# Altium PCB plexus_sense_template.PcbDoc
Units mil, origin at the board's own origin, x right, y up, seen from the top; angles counter-clockwise.
Board outline 765.97 x 2833.9 mil, 4 copper layers (Top Layer, Int1 (GND), Int2 (PWR), Bottom Layer), stack 16.657 mil thick; 1 components, 18 nets, 34 pads, 17 vias.
Unrouted connection lines stored in the file: 51.
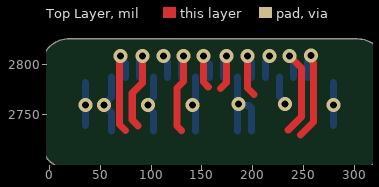
[diagram p0: Top Layer view]
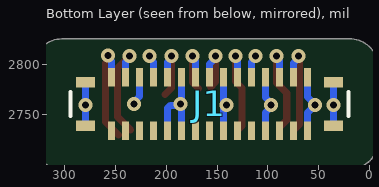
[diagram p1: Bottom Layer view, seen from below]

## Layer stack, top to bottom
Top Solder: solder mask 0.2362, SM-001, Dk 4
Top Layer: signal copper 0.9843
Dielectric 1: prepreg 5.1, PP-017, Dk 4.3
Dielectric 2: prepreg 0.5118, PP-017, Dk 4.3
Int1 (GND): signal copper 0.4724
Dielectric 3: core 2.5197, Core-039, Dk 4.8
Int2 (PWR): signal copper 0.4724
Dielectric 4: prepreg 0.5118, PP-017, Dk 4.3
Dielectric 5: prepreg 5.1, PP-017, Dk 4.3
Bottom Layer: signal copper 0.9843
Bottom Solder: solder mask 0.2362, SM-001, Dk 4

## Board outline
-8.97,80.79 -8.97,160.32 -8.97,160.41 -8.95,804.57 cw(c61.57,804.57) 14.79,857.35 29.55,872.1 56.01,898.57 56.01,2356.34 56.01,2688.03 ccw(c47.24,2688.03) 47.43,2696.79 33.46,2696.8 19.69,2696.8 47.24,2696.8 19.68,2696.8 cw(c19.68,2725.43) -8.95,2725.4 -8.95,2725.43 -8.95,2796.3 cw(c19.68,2796.3) 19.68,2824.94 167.7,2824.94 302.79,2824.89 cw(c302.78,2796.26) 331.42,2796.26 331.42,2725.39 331.42,2725.35 cw(c302.79,2725.39) 302.79,2696.75 289.01,2696.75 275.23,2696.75 ccw(c275.23,2687.99) 266.46,2687.99 266.46,2356.3 266.46,902.33 293.68,875.11 669.29,875.11 669.53,875.1 cw(c669.3,787.41) 757,787.51 757,787.4 757,78.74 756.99,78.5 cw(c669.29,78.73) 669.34,-8.97 80.79,-8.97 cw(c80.79,80.79)

## Design rules (kind name [scope] priority, off if disabled: settings)
BoardOutlineClearance [All] p1: gap=8 ignorepadtopadclearanceinfootprint=FALSE
Clearance [All] p1: gap=5 ignorepadtopadclearanceinfootprint=FALSE
DiffPairsRouting [All] p1: maxlimit=10 minlimit=10 mostfreqgap=10 substack1={99EB5755-EF74-4D5A-A978-238EC0D97C25} toplayer_{99eb5755-ef74-4d5a-a978-238ec0d97c25}_minwidth=15 toplayer_{99eb5755-ef74-4d5a-a978-238ec0d97c25}_maxwidth=15 toplayer_{99eb5755-ef74-4d5a-a978-238ec0d97c25}_prefwidth=15 midlayer1_{99eb5755-ef74-4d5a-a978-238ec0d97c25}_minwidth=15 midlayer1_{99eb5755-ef74-4d5a-a978-238ec0d97c25}_maxwidth=15 midlayer1_{99eb5755-ef74-4d5a-a978-238ec0d97c25}_prefwidth=15 midlayer2_{99eb5755-ef74-4d5a-a978-238ec0d97c25}_minwidth=15 midlayer2_{99eb5755-ef74-4d5a-a978-238ec0d97c25}_maxwidth=15 midlayer2_{99eb5755-ef74-4d5a-a978-238ec0d97c25}_prefwidth=15 bottomlayer_{99eb5755-ef74-4d5a-a978-238ec0d97c25}_minwidth=15 bottomlayer_{99eb5755-ef74-4d5a-a978-238ec0d97c25}_maxwidth=15 bottomlayer_{99eb5755-ef74-4d5a-a978-238ec0d97c25}_prefwidth=15 toplayer_minwidth=15 toplayer_maxwidth=15 toplayer_prefwidth=15 midlayer1_minwidth=15 midlayer1_maxwidth=15 midlayer1_prefwidth=15 midlayer2_minwidth=15 midlayer2_maxwidth=15 midlayer2_prefwidth=15 bottomlayer_minwidth=15 bottomlayer_maxwidth=15 bottomlayer_prefwidth=15 substack2={05907A41-C8C6-4068-A653-4EB994F4AA0D} toplayer_{05907a41-c8c6-4068-a653-4eb994f4aa0d}_minwidth=15 toplayer_{05907a41-c8c6-4068-a653-4eb994f4aa0d}_maxwidth=15 toplayer_{05907a41-c8c6-4068-a653-4eb994f4aa0d}_prefwidth=15 midlayer1_{05907a41-c8c6-4068-a653-4eb994f4aa0d}_minwidth=15 midlayer1_{05907a41-c8c6-4068-a653-4eb994f4aa0d}_maxwidth=15 midlayer1_{05907a41-c8c6-4068-a653-4eb994f4aa0d}_prefwidth=15 midlayer2_{05907a41-c8c6-4068-a653-4eb994f4aa0d}_minwidth=15 midlayer2_{05907a41-c8c6-4068-a653-4eb994f4aa0d}_maxwidth=15 midlayer2_{05907a41-c8c6-4068-a653-4eb994f4aa0d}_prefwidth=15 bottomlayer_{05907a41-c8c6-4068-a653-4eb994f4aa0d}_minwidth=15 bottomlayer_{05907a41-c8c6-4068-a653-4eb994f4aa0d}_maxwidth=15 bottomlayer_{05907a41-c8c6-4068-a653-4eb994f4aa0d}_prefwidth=15 maxuncoupledlength=500
PlaneClearance [All] p1: clearance=7
PlaneConnect [All] p1: planeconnectstyle=Direct reliefexpansion=20 reliefentries=4 reliefconductorwidth=10 reliefairgap=10
PolygonConnect [All] p1: thpad.connectstyle=Direct thpad.reliefconductorwidth=10 thpad.reliefentries=4 thpad.polygonreliefangle="90 Angle" thpad.airgapwidth=10 smdpad.connectstyle=Relief smdpad.reliefconductorwidth=7 smdpad.reliefentries=4 smdpad.polygonreliefangle="90 Angle" smdpad.airgapwidth=7 via.connectstyle=Direct via.reliefconductorwidth=10 via.reliefentries=4 via.polygonreliefangle="90 Angle" via.airgapwidth=10
PolygonConnect PolygonConnect_1 [InNet('1V8') vs IsNamedPolygon('1V8_CONN')] p2: connectstyle=Direct reliefconductorwidth=10 reliefentries=4 polygonreliefangle="90 Angle" airgapwidth=10
RoutingVias [All] p1: holewidth=10 width=50 viastyle="Through Hole" minholewidth=10 minwidth=20 maxholewidth=28 maxwidth=50
SolderMaskExpansion [IsVia] p1: expansion=4 istentingtop=TRUE
Width [All] p1: maxlimit=25 minlimit=4 preferedwidth=7 substack1={99EB5755-EF74-4D5A-A978-238EC0D97C25} substack2={05907A41-C8C6-4068-A653-4EB994F4AA0D}
27 further rules are at their usual default settings.

## Components (designator, comment, footprint, x,y, rotation, side; value= is the part's Value field where it differs from the comment)
J1 "BM23FR0.6-30DP-0.35V_895_" BM23FR0630DP035V895 157.48,2760.83 r180 bottom

## Footprints (in the part's own frame and the unit in brackets; to place one, negate y for a bottom-side part, rotate by r counter-clockwise, add the part's x,y. Pads: shape width x height; smd on the part's side, far side on the other; paste and mask are expansions set on the pad)
BM23FR0630DP035V895 [mm]
  rect 0.18x0.46 smd mask+0.08: 1(-2.45,-0.67) 2(-2.45,0.67) 3(-2.1,-0.67) 4(-2.1,0.67) 5(-1.75,-0.67) 6(-1.75,0.67) 7(-1.4,-0.67) 8(-1.4,0.67) 9(-1.05,-0.67) 10(-1.05,0.67) 11(-0.7,-0.67) 12(-0.7,0.67) 13(-0.35,-0.67) 14(-0.35,0.67) 15(0,-0.67) 16(0,0.67) 17(0.35,-0.67) 18(0.35,0.67) 19(0.7,-0.67) 20(0.7,0.67) 21(1.05,-0.67) 22(1.05,0.67) 23(1.4,-0.67) 24(1.4,0.67) 25(1.75,-0.67) 26(1.75,0.67) 27(2.1,-0.67) 28(2.1,0.67) 29(2.45,-0.67) 30(2.45,0.67)
  rect 0.47x0.26 smd: MP1(-3.1,-0.54) MP2(-3.1,0.54) MP3(3.1,-0.54) MP4(3.1,0.54)
  silkscreen extent -3.47,-0.3 3.47,0.3, body extent -3.47,-0.88 3.47,0.88, height 0.71

## Part data
J1: "Connector", Manufacturer_Name=Hirose, Manufacturer_Part_Number=BM23FR0.6-30DP-0.35V(895), Mouser Part Number=798-3FR0630DP035V895, Datasheet Link=https://www.hirose.com/product/document?clcode=CL0480-0325-0-95&productname=BM23FR0.6-30DP-0.35V(895)&series=BM23FR&documenttype=2DDrawing&lang=en&documentid=D164575_en, Height=0.615mm, Mouser Price/Stock=https://www.mouser.co.uk/ProductDetail/Hirose-Connector/BM23FR0.6-30DP-0.35V895?qs=YCa%2FAAYMW00qhFyDlbncMA%3D%3D

## Via types
v1: diameter 13.78, hole 6.89, Top Layer to Bottom Layer, tented both sides, 17 vias

## Nets (pads, with @x,y where several pads share a name; then routed paths per layer and width w, separated by ;. In a path a pad name is that pad's centre, name@x,y a point inside that pad or via, vN(x,y) a via of type N, cw(c..) or ccw(c..) an arc to the next point about the centre after c; other vN are vias at no path point)
1V8: J1.1 J1.3 J1.5 J1.7
GND: J1.6 J1.9 J1.11 J1.12 J1.17 J1.18 J1.23 J1.24 J1.29 J1.30 J1.MP1 J1.MP2 J1.MP3 J1.MP4 | length 375.5
  Bottom Layer w7: J1.MP3 v1(35.43,2759.84) J1.MP4 ; J1.29 61.02,2752.23 v1(53.41,2759.84) 53.41,2760.04 61.02,2767.65 J1.30 ; J1.23 102.36,2752.61 96.81,2758.16 v1(96.81,2759.84) 96.81,2761.68 102.36,2767.22 J1.24 ; J1.17 143.7,2755.2 140.9,2758.01 v1(140.9,2759.84) 140.9,2761.68 143.7,2764.48 J1.18 ; J1.11 J1.11 185.08,2759.89 v1(186.02,2760.83) ; J1.12 J1.12 185.08,2761.77 v1(186.02,2760.83) ; J1.9 198.82,2756.73 196.02,2759.53 187.32,2759.53 v1(186.02,2760.83) ; J1.6 226.38,2768.06 231.93,2762.51 v1(231.93,2760.83) ; J1.MP1 v1(279.53,2759.84) J1.MP2
I2C_CH1_SCK: J1.22 | length 22.5
  Bottom Layer w7: v1(112.2,2808.07) 112.2,2806.24 116.1,2802.34 116.1,2787.25 J1.22
I2C_CH1_SDA: J1.20 | length 99.6
  Top Layer w7: 129.92,2734.65 125.51,2739.06 125.51,2776.66 131.89,2783.04 v1(131.89,2808.07)
  Bottom Layer w7: J1.20 129.96,2787.25 129.96,2804.31 131.89,2806.24 v1(131.89,2808.07)
I2C_CH2_SCK: J1.10 | length 63.2
  Top Layer w7: v1(194.88,2808.04) 194.88,2776.58 201.41,2770.05
  Bottom Layer w7: v1(194.88,2808.04) 194.88,2806.2 198.78,2802.31 198.78,2787.25 J1.10
I2C_CH2_SDA: J1.8 | length 22.5
  Bottom Layer w7: J1.8 212.64,2787.25 212.64,2802.3 216.54,2806.2 v1(216.54,2808.03)
I2C_CH3_SCK: J1.28 | length 99.2
  Top Layer w7: v1(69.87,2808.05) 68.8,2806.98 68.8,2740.65 74.8,2734.65
  Bottom Layer w7: v1(69.87,2808.05) 69.87,2806.22 74.76,2801.34 74.76,2787.25 J1.28
I2C_CH3_SDA: J1.26 | length 97.2
  Top Layer w7: 86.97,2739.45 81.43,2744.99 81.43,2771.57 91.54,2781.68 v1(91.54,2808.05)
  Bottom Layer w7: J1.26 88.63,2787.25 88.63,2803.3 91.54,2806.21 v1(91.54,2808.05)
I2C_CH4_SCK: J1.16 | length 55.6
  Top Layer w7: v1(151.57,2808.05) 151.57,2782.43 156.29,2777.71
  Bottom Layer w7: v1(151.57,2808.05) 151.57,2806.21 157.44,2800.35 157.44,2787.25 J1.16
I2C_CH4_SDA: J1.14 | length 56.4
  Top Layer w7: 168.29,2776.2 174.21,2782.12 v1(174.21,2808.05)
  Bottom Layer w7: J1.14 171.3,2787.25 171.3,2803.3 174.21,2806.21 v1(174.21,2808.05)
I2C_CH5_SCK: J1.15
I2C_CH5_SDA: J1.13
I2C_CH6_SCK: J1.4 | length 105.4
  Top Layer w7: 235.05,2735.29 247.96,2748.19 247.96,2796.29 v1(236.22,2808.03)
  Bottom Layer w7: v1(236.22,2808.03) 236.22,2806.19 240.11,2802.3 240.11,2787.25 J1.4
I2C_CH6_SDA: J1.2 | length 107.5
  Top Layer w7: 247.05,2730.31 259.96,2743.22 259.96,2801.26 258.74,2802.48 258.74,2807.27 v1(257.44,2808.57)
  Bottom Layer w7: J1.2 253.98,2787.25 253.98,2803.28 257.44,2806.74 v1(257.44,2808.57)
I2C_CH7_SCK: J1.27
I2C_CH7_SDA: J1.25
I2C_CH8_SCK: J1.21
I2C_CH8_SDA: J1.19 | length 0

## Silkscreen, mask and mechanical layers (free items; w line width, h text height)
Mechanical 1:
  lines w8: 19.68,2696.8 cw(c19.68,2725.43) -8.95,2725.4 -8.95,2725.43 -8.95,2796.3 cw(c19.68,2796.3) 19.68,2824.94 167.7,2824.94 302.79,2824.89 cw(c302.78,2796.26) 331.42,2796.26 331.42,2725.39 331.42,2725.35 cw(c302.79,2725.39) 302.79,2696.75 289.01,2696.75 275.23,2696.75 ccw(c275.23,2687.99) 266.46,2687.99 266.46,2356.3 266.46,902.33 293.68,875.11 669.29,875.11 669.53,875.1 cw(c669.3,787.41) 757,787.51 757,787.4 757,78.74 756.99,78.5 cw(c669.29,78.73) 669.34,-8.97 80.79,-8.97 cw(c80.79,80.79) -8.97,80.79 -8.97,160.32 -8.97,160.41 -8.95,804.57 cw(c61.57,804.57) 14.79,857.35 29.55,872.1 56.01,898.57 56.01,2356.34 56.01,2688.03 ccw(c47.24,2688.03) 47.43,2696.79 33.46,2696.8 19.69,2696.8 ; 19.68,2696.8 47.24,2696.8 19.69,2696.8
Mold Cutout Layer:
  lines w5.91: 69.39,96.46 204.23,96.46 204.23,204.72 69.39,204.72 69.39,96.46 ; 69.39,273.62 69.39,381.89 204.23,381.89 204.23,273.62 69.39,273.62 ; 69.39,450.79 69.39,559.06 204.23,559.06 204.23,450.79 69.39,450.79 ; 69.39,627.95 69.39,736.22 204.23,736.22 204.23,627.95 69.39,627.95 ; 226.87,96.46 226.87,204.72 361.71,204.72 361.71,96.46 226.87,96.46 ; 226.87,273.62 361.71,273.62 361.71,381.89 226.87,381.89 226.87,273.62 ; 226.87,450.79 361.71,450.79 361.71,559.06 226.87,559.06 226.87,450.79 ; 226.87,627.95 361.71,627.95 361.71,736.22 226.87,736.22 226.87,627.95 ; 384.35,96.46 384.35,204.72 519.19,204.72 519.19,96.46 384.35,96.46 ; 384.35,273.62 519.19,273.62 519.19,381.89 384.35,381.89 384.35,273.62 ; 384.35,450.79 519.19,450.79 519.19,559.06 384.35,559.06 384.35,450.79 ; 384.35,627.95 519.19,627.95 519.19,736.22 384.35,736.22 384.35,627.95 ; 541.83,96.46 541.83,204.72 676.67,204.72 676.67,96.46 541.83,96.46 ; 541.83,273.62 541.83,381.89 676.67,381.89 676.67,273.62 541.83,273.62 ; 541.83,450.79 541.83,559.06 676.67,559.06 676.67,450.79 541.83,450.79 ; 541.83,627.95 676.67,627.95 676.67,736.22 541.83,736.22 541.83,627.95
FlexStiff_TOP (Mech4):
  region: 19.69,2696.8 cw(c19.69,2725.43) -8.95,2725.4 -8.95,2725.43 -8.95,2796.3 cw(c19.68,2796.3) 19.68,2824.94 167.7,2824.94 302.79,2824.89 cw(c302.78,2796.26) 331.42,2796.26 331.42,2725.39 331.42,2725.35 cw(c302.79,2725.39) 302.79,2696.75 289.01,2696.75 275.23,2696.75 275.06,2696.76 33.46,2696.8
  text "0.2mm Al Stiffener (TOP)" at -478,2958 h60
FlexStiff_BOT:
  region: -13.05,80.98 -13.05,160.51 -13.05,160.6 -13.04,804.75 cw(c61.51,804.76) 11.97,860.46 26.64,875.13 29.8,876.29 292.09,879.01 293.62,879.31 669.23,879.31 669.48,879.3 cw(c669.23,787.59) 760.95,787.7 760.95,787.59 760.95,78.93 760.94,78.67 cw(c669.23,78.92) 669.27,-12.8 80.73,-12.8 cw(c80.73,80.98)
  text "0.2mm Al Stiffener (BOT)" at 1025,-192 h60